# Altium PCB PCB.PcbDoc (part 2 of 3)
Units mm, origin at the board's own origin, x right, y up, seen from the top; angles counter-clockwise.
Board outline 53 x 36 mm, 2 copper layers (Top Layer, Bottom Layer); 30 components, 49 nets, 163 pads, 111 vias.
Unrouted connection lines stored in the file: 1.
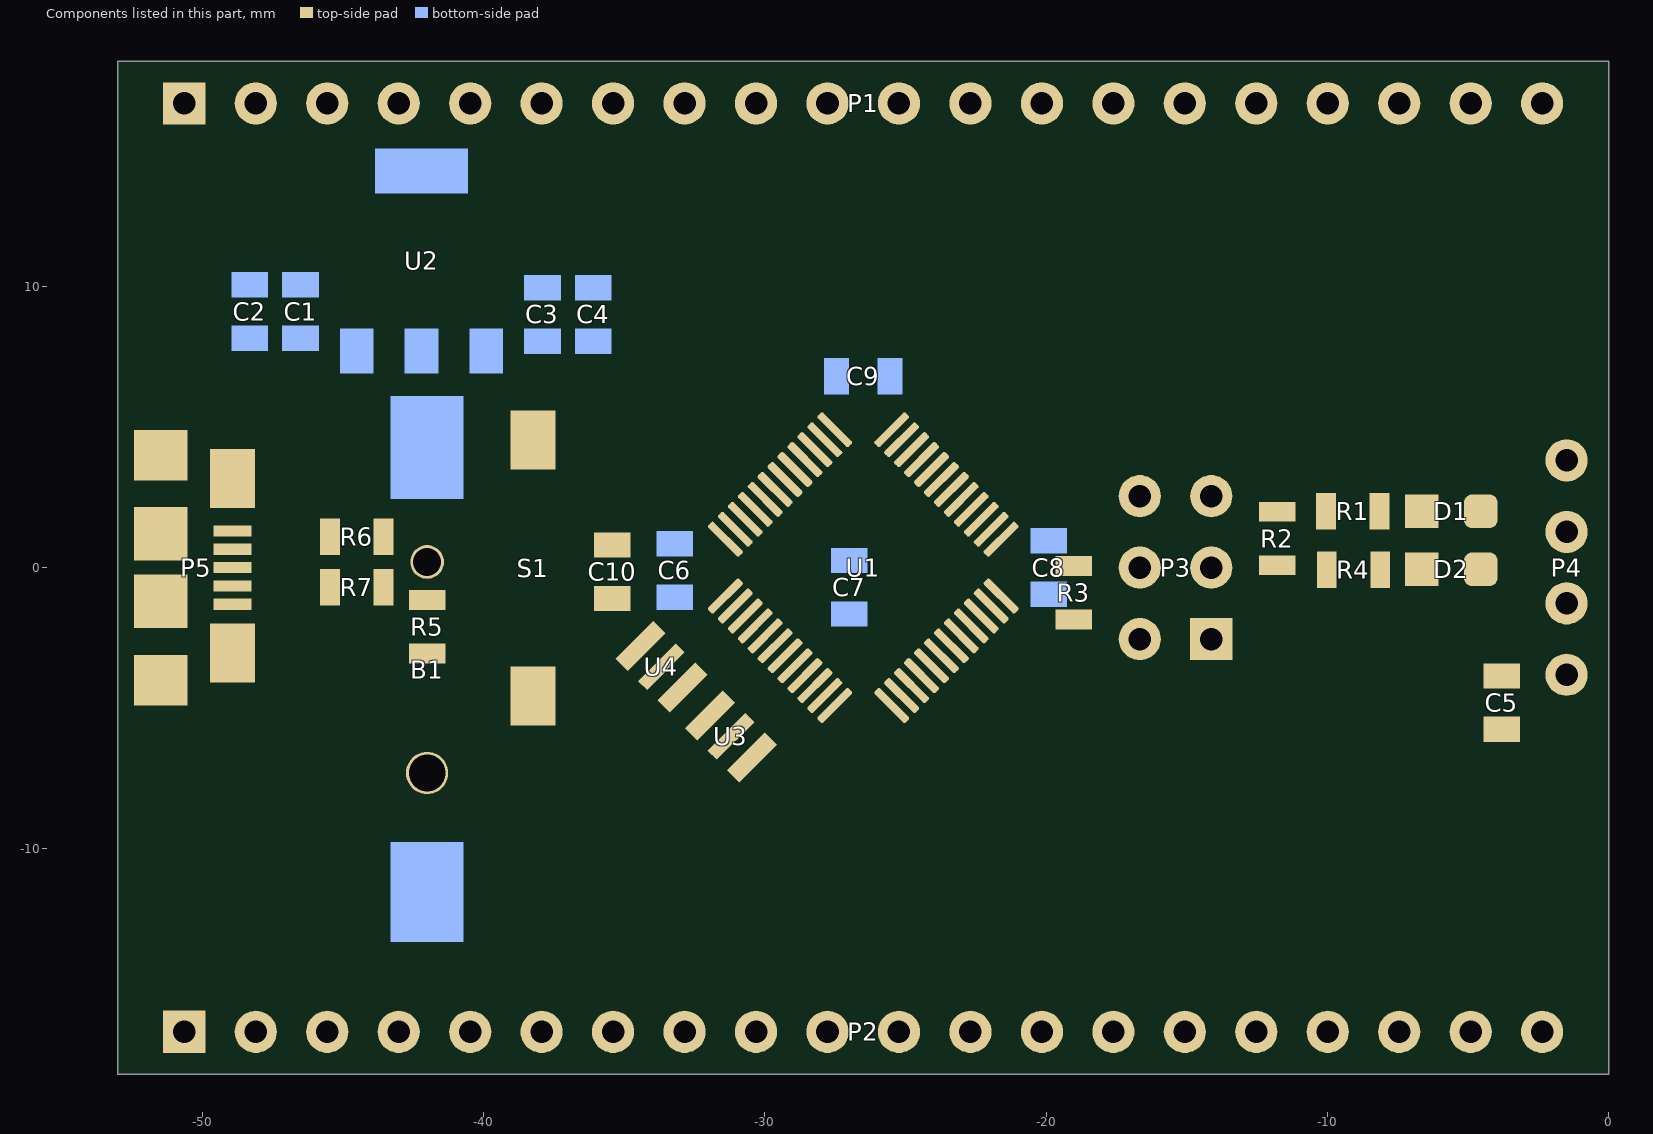
[diagram p2: the components of this part, seen from the top]

## Via types
v1: diameter 0.8, hole 0.5, Top Layer to Bottom Layer, tented both sides, 111 vias

## Nets (pads, with @x,y where several pads share a name; then routed paths per layer and width w, separated by ;. In a path a pad name is that pad's centre, name@x,y a point inside that pad or via, vN(x,y) a via of type N, cw(c..) or ccw(c..) an arc to the next point about the centre after c; other vN are vias at no path point) (continued)
copper on no net: (continued)
  Bottom Layer w0.018: -31.034,-14.158 -19.744,-14.158 ; -31.034,-14.141 -19.744,-14.141 ; -31.034,-14.123 -19.744,-14.123 ; -31.034,-14.105 -19.744,-14.105 ; -31.034,-14.087 -19.744,-14.087 ; -31.034,-14.07 -19.744,-14.07 ; -31.034,-14.052 -19.744,-14.052 ; -31.034,-14.034 -19.744,-14.034 ; -31.034,-14.016 -19.744,-14.016 ; -31.034,-13.998 -19.744,-13.998 ; -31.034,-13.981 -19.744,-13.981 ; -31.034,-13.963 -19.744,-13.963 ; -31.034,-13.945 -19.744,-13.945 ; -31.034,-13.927 -19.744,-13.927 ; -31.034,-13.91 -19.744,-13.91 ; -31.034,-13.892 -19.744,-13.892 ; -31.034,-13.874 -19.744,-13.874 ; -31.034,-13.856 -19.744,-13.856 ; -31.034,-13.838 -19.744,-13.838 ; -31.034,-13.821 -19.744,-13.821 ; -31.034,-13.803 -19.744,-13.803 ; -31.034,-13.785 -19.744,-13.785 ; -31.034,-13.767 -19.744,-13.767 ; -31.034,-13.75 -19.744,-13.75 ; -31.034,-13.732 -30.163,-13.732 ; -31.034,-13.714 -30.198,-13.714 ; -31.034,-13.696 -30.234,-13.696 ; -31.034,-13.678 -30.269,-13.678 ; -31.034,-13.661 -30.287,-13.661 ; -31.034,-13.643 -30.323,-13.643 ; -31.034,-13.625 -30.341,-13.625 ; -31.034,-13.607 -30.358,-13.607 ; -31.034,-13.589 -30.376,-13.589 ; -31.034,-13.572 -30.394,-13.572 ; -31.034,-13.554 -30.412,-13.554 ; -31.034,-13.536 -30.429,-13.536 ; -31.034,-13.518 -30.447,-13.518 ; -31.034,-13.501 -30.465,-13.501 ; -31.034,-13.483 -30.483,-13.483 ; -31.034,-13.465 -30.501,-13.465 ; -31.034,-13.447 -30.501,-13.447 ; -31.034,-13.429 -30.518,-13.429 ; -31.034,-13.412 -30.536,-13.412 ; -31.034,-13.394 -30.536,-13.394 ; -31.034,-13.376 -30.554,-13.376 ; -31.034,-13.358 -30.554,-13.358 ; -31.034,-13.341 -30.572,-13.341 ; -31.034,-13.323 -30.572,-13.323 ; -31.034,-13.305 -30.572,-13.305 ; -31.034,-13.287 -30.589,-13.287 ; -31.034,-13.269 -30.589,-13.269 ; -31.034,-13.252 -30.589,-13.252 ; -31.034,-13.234 -30.607,-13.234 ; -31.034,-13.216 -30.607,-13.216 ; -31.034,-13.198 -30.607,-13.198 ; -31.034,-13.181 -30.607,-13.181 ; -31.034,-13.163 -30.607,-13.163 ; -31.034,-13.145 -30.607,-13.145 ; -31.034,-13.127 -30.607,-13.127 ; -31.034,-13.109 -30.607,-13.109 ; -31.034,-13.092 -30.607,-13.092 ; -31.034,-13.074 -30.607,-13.074 ; -31.034,-13.056 -30.607,-13.056 ; -31.034,-13.038 -30.607,-13.038 ; -31.034,-13.021 -30.607,-13.021 ; -31.034,-13.003 -30.607,-13.003 ; -31.034,-12.985 -30.607,-12.985 ; -31.034,-12.967 -30.607,-12.967 ; -31.034,-12.949 -30.607,-12.949 ; -31.034,-12.932 -30.607,-12.932 ; -31.034,-12.914 -30.607,-12.914 ; -31.034,-12.896 -30.607,-12.896 ; -31.034,-12.878 -30.607,-12.878 ; -31.034,-12.861 -30.607,-12.861 ; -31.034,-12.843 -30.607,-12.843 ; -31.034,-12.825 -30.607,-12.825 ; -31.034,-12.807 -30.607,-12.807 ; -31.034,-12.789 -30.607,-12.789 ; -31.034,-12.772 -30.607,-12.772 ; -31.034,-12.754 -30.607,-12.754 ; -31.034,-12.736 -30.607,-12.736 ; -31.034,-12.718 -30.607,-12.718 ; -31.034,-12.7 -30.607,-12.7 ; -31.034,-12.683 -30.607,-12.683 ; -31.034,-12.665 -30.607,-12.665 ; -31.034,-12.647 -30.607,-12.647 ; -31.034,-12.629 -30.607,-12.629 ; -31.034,-12.612 -30.607,-12.612 ; -31.034,-12.594 -30.607,-12.594 ; -31.034,-12.576 -30.607,-12.576 ; -31.034,-12.558 -30.607,-12.558 ; -31.034,-12.54 -30.607,-12.54 ; -31.034,-12.523 -30.607,-12.523 ; -31.034,-12.505 -30.607,-12.505 ; -31.034,-12.487 -30.607,-12.487 ; -31.034,-12.469 -30.607,-12.469 ; -31.034,-12.452 -30.607,-12.452 ; -31.034,-12.434 -30.607,-12.434 ; -31.034,-12.416 -30.607,-12.416 ; -31.034,-12.398 -30.607,-12.398 ; -31.034,-12.38 -30.607,-12.38 ; -31.034,-12.363 -30.607,-12.363 ; -31.034,-12.345 -30.607,-12.345 ; -31.034,-12.327 -30.607,-12.327 ; -31.034,-12.309 -30.607,-12.309 ; -31.034,-12.292 -30.607,-12.292 ; -31.034,-12.274 -30.607,-12.274 ; -31.034,-12.256 -30.607,-12.256 ; -31.034,-12.238 -30.607,-12.238 ; -31.034,-12.22 -30.607,-12.22 ; -31.034,-12.203 -30.607,-12.203 ; -31.034,-12.185 -30.607,-12.185 ; -31.034,-12.167 -30.607,-12.167 ; -31.034,-12.149 -30.607,-12.149 ; -31.034,-12.132 -30.607,-12.132 ; -31.034,-12.114 -30.607,-12.114 ; -31.034,-12.096 -30.607,-12.096 ; -31.034,-12.078 -30.607,-12.078 ; -31.034,-12.06 -30.607,-12.06 ; -31.034,-12.043 -30.607,-12.043 ; -31.034,-12.025 -30.607,-12.025 ; -31.034,-12.007 -30.607,-12.007 ; -31.034,-11.989 -30.607,-11.989 ; -31.034,-11.972 -30.607,-11.972 ; -31.034,-11.954 -30.607,-11.954 ; -31.034,-11.936 -30.607,-11.936 ; -31.034,-11.918 -30.607,-11.918 ; -31.034,-11.9 -30.607,-11.9 ; -31.034,-11.883 -30.607,-11.883 ; -31.034,-11.865 -30.607,-11.865 ; -31.034,-11.847 -30.607,-11.847 ; -31.034,-11.829 -30.607,-11.829 ; -31.034,-11.811 -30.607,-11.811 ; -31.034,-11.794 -30.607,-11.794 ; -31.034,-11.776 -30.607,-11.776 ; -31.034,-11.758 -30.607,-11.758 ; -31.034,-11.74 -30.607,-11.74 ; -31.034,-11.723 -30.607,-11.723 ; -31.034,-11.705 -30.607,-11.705 ; -31.034,-11.687 -30.607,-11.687 ; -31.034,-11.669 -30.607,-11.669 ; -31.034,-11.651 -30.607,-11.651 ; -31.034,-11.634 -30.607,-11.634 ; -31.034,-11.616 -30.607,-11.616 ; -31.034,-11.598 -30.607,-11.598 ; -31.034,-11.58 -30.607,-11.58 ; -31.034,-11.563 -30.607,-11.563 ; -31.034,-11.545 -30.607,-11.545 ; -31.034,-11.527 -30.607,-11.527 ; -31.034,-11.509 -30.607,-11.509 ; -31.034,-11.491 -30.607,-11.491 ; -31.034,-11.474 -30.607,-11.474 ; -31.034,-11.456 -30.607,-11.456 ; -31.034,-11.438 -30.607,-11.438 ; -31.034,-11.42 -30.607,-11.42 ; -31.034,-11.403 -30.607,-11.403 ; -31.034,-11.385 -30.607,-11.385 ; -31.034,-11.367 -30.607,-11.367 ; -31.034,-11.349 -30.607,-11.349 ; -31.034,-11.331 -30.607,-11.331 ; -31.034,-11.314 -30.607,-11.314 ; -31.034,-11.296 -30.607,-11.296 ; -31.034,-11.278 -30.607,-11.278 ; -31.034,-11.26 -30.607,-11.26 ; -31.034,-11.243 -30.607,-11.243 ; -31.034,-11.225 -30.607,-11.225 ; -31.034,-11.207 -30.607,-11.207 ; -31.034,-11.189 -30.607,-11.189 ; -31.034,-11.171 -30.607,-11.171 ; -31.034,-11.154 -30.607,-11.154 ; -31.034,-11.136 -30.607,-11.136 ; -31.034,-11.118 -30.607,-11.118 ; -31.034,-11.1 -30.607,-11.1 ; -31.034,-11.083 -30.607,-11.083 ; -31.034,-11.065 -30.607,-11.065 ; -31.034,-11.047 -30.607,-11.047 ; -31.034,-11.029 -30.607,-11.029 ; -31.034,-11.011 -30.607,-11.011 ; -31.034,-10.994 -30.607,-10.994 ; -31.034,-10.976 -30.607,-10.976 ; -31.034,-10.958 -30.607,-10.958 ; -31.034,-10.94 -30.607,-10.94 ; -31.034,-10.922 -30.607,-10.922 ; -31.034,-10.905 -30.607,-10.905 ; -31.034,-10.887 -30.607,-10.887 ; -31.034,-10.869 -30.607,-10.869 ; -31.034,-10.851 -30.607,-10.851 ; -31.034,-10.834 -30.607,-10.834 ; -31.034,-10.816 -30.607,-10.816 ; -31.034,-10.798 -30.607,-10.798 ; -31.034,-10.78 -30.607,-10.78 ; -31.034,-10.762 -30.607,-10.762 ; -31.034,-10.745 -30.607,-10.745 ; -31.034,-10.727 -30.607,-10.727 ; -31.034,-10.709 -30.607,-10.709 ; -31.034,-10.691 -30.607,-10.691 ; -31.034,-10.674 -30.607,-10.674 ; -31.034,-10.656 -30.607,-10.656 ; -31.034,-10.638 -30.607,-10.638 ; -31.034,-10.62 -30.607,-10.62 ; -31.034,-10.602 -30.607,-10.602 ; -31.034,-10.585 -30.607,-10.585 ; -31.034,-10.567 -30.607,-10.567 ; -31.034,-10.549 -30.607,-10.549 ; -31.034,-10.531 -30.607,-10.531 ; -31.034,-10.514 -30.607,-10.514 ; -31.034,-10.496 -30.607,-10.496 ; -31.034,-10.478 -30.607,-10.478 ; -31.034,-10.46 -30.607,-10.46 ; -31.034,-10.442 -30.607,-10.442 ; -31.034,-10.425 -30.607,-10.425 ; -31.034,-10.407 -30.607,-10.407 ; -31.034,-10.389 -30.607,-10.389 ; -31.034,-10.371 -30.607,-10.371 ; -31.034,-10.354 -30.607,-10.354 ; -31.034,-10.336 -30.607,-10.336 ; -31.034,-10.318 -30.607,-10.318 ; -31.034,-10.3 -30.607,-10.3 ; -31.034,-10.282 -30.607,-10.282 ; -31.034,-10.265 -30.607,-10.265 ; -31.034,-10.247 -30.607,-10.247 ; -31.034,-10.229 -30.607,-10.229 ; -31.034,-10.211 -30.607,-10.211 ; -31.034,-10.194 -30.607,-10.194 ; -31.034,-10.176 -30.607,-10.176 ; -31.034,-10.158 -30.607,-10.158 ; -31.034,-10.14 -30.607,-10.14 ; -31.034,-10.122 -30.607,-10.122 ; -31.034,-10.105 -30.607,-10.105 ; -31.034,-10.087 -30.607,-10.087 ; -31.034,-10.069 -30.607,-10.069 ; -31.034,-10.051 -30.607,-10.051 ; -31.034,-10.033 -30.607,-10.033 ; -31.034,-10.016 -30.607,-10.016 ; -31.034,-9.998 -30.607,-9.998 ; -31.034,-9.98 -30.607,-9.98 ; -31.034,-9.962 -30.607,-9.962 ; -31.034,-9.945 -30.607,-9.945 ; -31.034,-9.927 -30.607,-9.927 ; -31.034,-9.909 -30.607,-9.909 ; -31.034,-9.891 -30.607,-9.891 ; -31.034,-9.873 -30.607,-9.873 ; -31.034,-9.856 -30.607,-9.856 ; -31.034,-9.838 -30.607,-9.838 ; -31.034,-9.82 -30.607,-9.82 ; -31.034,-9.802 -30.607,-9.802 ; -31.034,-9.785 -30.607,-9.785 ; -31.034,-9.767 -30.607,-9.767 ; -31.034,-9.749 -30.607,-9.749 ; -31.034,-9.731 -30.607,-9.731 ; -31.034,-9.713 -30.607,-9.713 ; -31.034,-9.696 -30.607,-9.696 ; -31.034,-9.678 -30.607,-9.678 ; -31.034,-9.66 -30.607,-9.66 ; -31.034,-9.642 -30.607,-9.642 ; -31.034,-9.625 -30.607,-9.625 ; -31.034,-9.607 -30.607,-9.607 ; -31.034,-9.589 -30.607,-9.589 ; -31.034,-9.571 -30.607,-9.571 ; -31.034,-9.553 -30.607,-9.553 ; -31.034,-9.536 -30.607,-9.536 ; -31.034,-9.518 -30.607,-9.518 ; -31.034,-9.5 -30.607,-9.5 ; -31.034,-9.482 -30.607,-9.482 ; -31.034,-9.465 -30.607,-9.465 ; -31.034,-9.447 -30.607,-9.447 ; -31.034,-9.429 -30.607,-9.429 ; -31.034,-9.411 -30.607,-9.411 ; -31.034,-9.393 -30.607,-9.393 ; -31.034,-9.376 -30.607,-9.376 ; -31.034,-9.358 -30.607,-9.358 ; -31.034,-9.34 -30.607,-9.34 ; -31.034,-9.322 -30.607,-9.322 ; -31.034,-9.305 -30.607,-9.305 ; -31.034,-9.287 -30.607,-9.287 ; -31.034,-9.269 -19.744,-9.269 ; -31.034,-9.251 -19.744,-9.251 ; -31.034,-9.233 -19.744,-9.233 ; -31.034,-9.216 -19.744,-9.216 ; -31.034,-9.198 -19.744,-9.198 ; -31.034,-9.18 -19.744,-9.18 ; -31.034,-9.162 -19.744,-9.162 ; -31.034,-9.144 -19.744,-9.144 ; -31.034,-9.127 -19.744,-9.127 ; -31.034,-9.109 -19.744,-9.109 ; -31.034,-9.091 -19.744,-9.091 ; -31.034,-9.073 -19.744,-9.073 ; -31.034,-9.056 -19.744,-9.056 ; -31.034,-9.038 -19.744,-9.038 ; -31.034,-9.02 -19.744,-9.02 ; -31.034,-9.002 -19.744,-9.002 ; -31.034,-8.984 -19.744,-8.984 ; -31.034,-8.967 -19.744,-8.967 ; -31.034,-8.949 -19.744,-8.949 ; -31.034,-8.931 -19.744,-8.931 ; -31.034,-8.913 -19.744,-8.913 ; -31.034,-8.896 -19.744,-8.896 ; -31.034,-8.878 -19.744,-8.878 ; -31.034,-8.86 -19.744,-8.86 ; -29.878,-12.629 -29.861,-12.629 ; -29.878,-12.612 -29.861,-12.612 ; -29.878,-12.594 -29.861,-12.594 ; -29.878,-12.576 -29.861,-12.576 ; -29.878,-12.558 -29.861,-12.558 ; -29.878,-12.54 -29.825,-12.54 ; -29.878,-12.523 -29.825,-12.523 ; -29.878,-12.505 -29.843,-12.505 ; -29.878,-12.078 -29.861,-12.078 ; -29.878,-12.06 -29.861,-12.06 ; -29.878,-12.043 -29.861,-12.043 ; -29.878,-12.025 -29.861,-12.025 ; -29.878,-12.007 -29.861,-12.007 ; -29.878,-11.989 -29.861,-11.989 ; -29.878,-11.972 -29.825,-11.972 ; -29.878,-11.954 -29.825,-11.954 ; -29.878,-11.936 -29.843,-11.936 ; -29.843,-12.576 -29.807,-12.576 ; -29.843,-12.558 -29.807,-12.558 ; -29.843,-12.007 -29.807,-12.007 ; -29.843,-11.989 -29.825,-11.989 ; -29.825,-12.612 -29.772,-12.612 ; -29.825,-12.594 -29.754,-12.594 ; -29.825,-12.06 -29.772,-12.06 ; -29.825,-12.043 -29.772,-12.043 ; -29.825,-12.025 -29.807,-12.025 ; -29.807,-12.629 -29.772,-12.629 ; -29.807,-12.078 -29.772,-12.078 ; -29.789,-12.576 -29.754,-12.576 ; -29.789,-12.025 -29.754,-12.025 ; -29.772,-12.558 -29.7,-12.558 ; -29.772,-12.54 -29.7,-12.54 ; -29.772,-12.007 -29.754,-12.007 ; -29.772,-11.989 -29.7,-11.989 ; -29.772,-11.972 -29.7,-11.972 ; -29.754,-12.523 -29.7,-12.523 ; -29.754,-12.505 -29.7,-12.505 ; -29.754,-11.954 -29.7,-11.954 ; -29.754,-11.936 -29.7,-11.936 ; -29.736,-12.629 -29.7,-12.629 ; -29.736,-12.612 -29.7,-12.612 ; -29.736,-12.594 -29.7,-12.594 ; -29.736,-12.576 -29.7,-12.576 ; -29.736,-12.078 -29.7,-12.078 ; -29.736,-12.06 -29.7,-12.06 ; -29.736,-12.043 -29.7,-12.043 ; -29.736,-12.025 -29.7,-12.025 ; -29.736,-12.007 -29.7,-12.007 ; -29.683,-12.505 -29.558,-12.505 ; -29.683,-11.936 -29.558,-11.936 ; -29.683,-10.887 -27.425,-10.887 ; -29.683,-10.869 -27.425,-10.869 ; -29.683,-10.851 -27.425,-10.851 ; -29.683,-10.834 -27.425,-10.834 ; -29.683,-10.816 -27.442,-10.816 ; -29.683,-10.798 -27.442,-10.798 ; -29.665,-10.976 -29.06,-10.976 ; -29.665,-10.958 -29.043,-10.958 ; -29.665,-10.94 -27.407,-10.94 ; -29.665,-10.922 -27.407,-10.922 ; -29.665,-10.905 -27.407,-10.905 ; -29.665,-10.78 -28.847,-10.78 ; -29.665,-10.762 -28.865,-10.762 ; -29.665,-10.745 -28.883,-10.745 ; -29.665,-10.727 -28.9,-10.727 ; -29.647,-11.047 -29.096,-11.047 ; -29.647,-11.029 -29.078,-11.029 ; -29.647,-11.011 -29.078,-11.011 ; -29.647,-10.994 -29.078,-10.994 ; -29.647,-10.709 -28.918,-10.709 ; -29.647,-10.691 -28.936,-10.691 ; -29.629,-12.629 -29.612,-12.629 ; -29.629,-12.612 -29.612,-12.612 ; -29.629,-12.594 -29.612,-12.594 ; -29.629,-12.576 -29.612,-12.576 ; -29.629,-12.558 -29.612,-12.558 ; -29.629,-12.54 -29.612,-12.54 ; -29.629,-12.523 -29.612,-12.523 ; -29.629,-12.078 -29.594,-12.078 ; -29.629,-12.06 -29.594,-12.06 ; -29.629,-12.043 -29.594,-12.043 ; -29.629,-12.025 -29.594,-12.025 ; -29.629,-12.007 -29.594,-12.007 ; -29.629,-11.989 -29.594,-11.989 ; -29.629,-11.972 -29.594,-11.972 ; -29.629,-11.954 -29.594,-11.954 ; -29.629,-11.118 -29.078,-11.118 ; -29.629,-11.1 -29.078,-11.1 ; -29.629,-11.083 -29.078,-11.083 ; -29.629,-11.065 -29.078,-11.065 ; -29.629,-10.674 -28.972,-10.674 ; -29.612,-11.189 -29.06,-11.189 ; -29.612,-11.171 -29.06,-11.171 ; -29.612,-11.154 -29.06,-11.154 ; -29.612,-11.136 -29.078,-11.136 ; -29.612,-10.656 -29.007,-10.656 ; -29.594,-11.26 -29.043,-11.26 ; -29.594,-11.243 -29.043,-11.243 ; -29.594,-11.225 -29.043,-11.225 ; -29.594,-11.207 -29.06,-11.207 ; -29.576,-11.331 -29.025,-11.331 ; -29.576,-11.314 -29.025,-11.314 ; -29.576,-11.296 -29.025,-11.296 ; -29.576,-11.278 -29.043,-11.278 ; -29.576,-10.638 -29.043,-10.638 ; -29.558,-11.403 -29.007,-11.403 ; -29.558,-11.385 -29.007,-11.385 ; -29.558,-11.367 -29.007,-11.367 ; -29.558,-11.349 -29.025,-11.349 ; -29.54,-11.474 -28.989,-11.474 ; -29.54,-11.456 -28.989,-11.456 ; -29.54,-11.438 -28.989,-11.438 ; -29.54,-11.42 -29.007,-11.42 ; -29.54,-10.62 -29.078,-10.62 ; -29.523,-11.545 -28.972,-11.545 ; -29.523,-11.527 -28.972,-11.527 ; -29.523,-11.509 -28.972,-11.509 ; -29.523,-11.491 -28.989,-11.491 ; -29.505,-11.616 -28.954,-11.616 ; -29.505,-11.598 -28.954,-11.598 ; -29.505,-11.58 -28.954,-11.58 ; -29.505,-11.563 -28.972,-11.563 ; -29.505,-10.602 -29.132,-10.602 ; -29.487,-11.687 -28.936,-11.687 ; -29.487,-11.669 -28.936,-11.669 ; -29.487,-11.651 -28.936,-11.651 ; -29.487,-11.634 -28.954,-11.634 ; -29.469,-11.758 -28.918,-11.758 ; -29.469,-11.74 -28.918,-11.74 ; -29.469,-11.723 -28.918,-11.723 ; -29.469,-11.705 -28.936,-11.705 ; -29.452,-11.829 -28.9,-11.829 ; -29.452,-11.811 -28.9,-11.811 ; -29.452,-11.794 -28.9,-11.794 ; -29.452,-11.776 -28.918,-11.776 ; -29.434,-12.683 -29.292,-12.683 ; -29.434,-12.665 -29.292,-12.665 ; -29.434,-12.647 -29.363,-12.647 ; -29.434,-12.629 -29.38,-12.629 ; -29.434,-11.865 -28.883,-11.865 ; -29.434,-11.847 -28.9,-11.847 ; -29.416,-11.9 -28.883,-11.9 ; -29.416,-11.883 -28.883,-11.883 ; -29.416,-10.585 -29.238,-10.585 ; -29.398,-11.918 -28.883,-11.918 ; -29.38,-12.7 -29.292,-12.7 ; -29.38,-11.954 -28.865,-11.954 ; -29.38,-11.936 -28.865,-11.936 ; -29.363,-12.878 -29.292,-12.878 ; -29.363,-12.861 -29.292,-12.861 ; -29.363,-12.843 -29.292,-12.843 ; -29.363,-12.825 -29.292,-12.825 ; -29.363,-12.807 -29.292,-12.807 ; -29.363,-12.789 -29.292,-12.789 ; -29.363,-12.772 -29.292,-12.772 ; -29.363,-12.754 -29.292,-12.754 ; -29.363,-12.736 -29.292,-12.736 ; -29.363,-12.718 -29.292,-12.718 ; -29.363,-11.972 -28.865,-11.972 ; -29.345,-12.647 -29.292,-12.647 ; -29.345,-12.629 -29.292,-12.629 ; -29.345,-11.989 -28.865,-11.989 ; -29.309,-12.007 -28.847,-12.007 ; -29.292,-12.025 -28.847,-12.025 ; -29.256,-12.043 -28.847,-12.043 ; -29.22,-12.06 -28.847,-12.06 ; -29.203,-12.772 -28.954,-12.772 ; -29.203,-12.754 -28.954,-12.754 ; -29.203,-12.736 -28.954,-12.736 ; -29.203,-12.718 -29.132,-12.718 ; -29.203,-12.7 -29.132,-12.7 ; -29.185,-12.861 -29.007,-12.861 ; -29.185,-12.843 -28.989,-12.843 ; -29.185,-12.825 -29.167,-12.825 ; -29.185,-12.683 -29.132,-12.683 ; -29.185,-12.665 -28.989,-12.665 ; -29.167,-12.878 -29.025,-12.878 ; -29.167,-12.647 -29.007,-12.647 ; -29.149,-12.629 -29.025,-12.629 ; -29.149,-12.078 -28.829,-12.078 ; -29.06,-12.825 -28.972,-12.825 ; -29.043,-12.807 -28.972,-12.807 ; -29.043,-12.683 -28.972,-12.683 ; -29.025,-12.789 -28.954,-12.789 ; -29.025,-12.718 -28.954,-12.718 ; -29.025,-12.7 -28.972,-12.7 ; -28.883,-12.878 -28.811,-12.878 ; -28.883,-12.861 -28.811,-12.861 ; -28.883,-12.843 -28.811,-12.843 ; -28.883,-12.825 -28.811,-12.825 ; -28.883,-12.807 -28.811,-12.807 ; -28.883,-12.789 -28.811,-12.789 ; -28.883,-12.772 -28.811,-12.772 ; -28.883,-12.754 -28.811,-12.754 ; -28.883,-12.736 -28.811,-12.736 ; -28.883,-12.718 -28.811,-12.718 ; -28.883,-12.7 -28.811,-12.7 ; -28.883,-12.683 -28.811,-12.683 ; -28.883,-12.665 -28.811,-12.665 ; -28.883,-12.647 -28.811,-12.647 ; -28.883,-12.629 -28.811,-12.629 ; -28.883,-12.558 -28.811,-12.558 ; -28.883,-12.54 -28.811,-12.54 ; -28.883,-12.523 -28.811,-12.523 ; -28.883,-10.958 -28.189,-10.958 ; -28.847,-10.976 -28.207,-10.976 ; -28.829,-10.994 -28.225,-10.994 ; -28.829,-10.78 -28.011,-10.78 ; -28.811,-11.011 -28.225,-11.011 ; -28.811,-10.762 -28.029,-10.762 ; -28.811,-10.745 -28.047,-10.745 ; -28.811,-10.727 -28.065,-10.727 ; -28.794,-11.047 -28.225,-11.047 ; -28.794,-11.029 -28.225,-11.029 ; -28.794,-10.709 -28.083,-10.709 ; -28.776,-11.1 -28.225,-11.1 ; -28.776,-11.083 -28.225,-11.083 ; -28.776,-11.065 -28.225,-11.065 ; -28.776,-10.691 -28.1,-10.691 ; -28.776,-10.674 -28.136,-10.674 ; -28.758,-11.154 -28.207,-11.154 ; -28.758,-11.136 -28.207,-11.136 ; -28.758,-11.118 -28.225,-11.118 ; -28.758,-10.656 -28.154,-10.656 ; -28.74,-12.807 -28.651,-12.807 ; -28.74,-11.225 -28.189,-11.225 ; -28.74,-11.207 -28.189,-11.207 ; -28.74,-11.189 -28.207,-11.189 ; -28.74,-11.171 -28.207,-11.171 ; -28.723,-12.843 -28.545,-12.843 ; -28.723,-12.825 -28.651,-12.825 ; -28.723,-12.789 -28.651,-12.789 ; -28.723,-12.772 -28.616,-12.772 ; -28.723,-12.754 -28.563,-12.754 ; -28.723,-12.665 -28.545,-12.665 ; -28.723,-12.647 -28.563,-12.647 ; -28.723,-12.629 -28.58,-12.629 ; -28.723,-11.296 -28.171,-11.296 ; -28.723,-11.278 -28.171,-11.278 ; -28.723,-11.26 -28.189,-11.26 ; -28.723,-11.243 -28.189,-11.243 ; -28.723,-10.638 -28.189,-10.638 ; -28.705,-12.861 -28.545,-12.861 ; -28.705,-11.367 -28.154,-11.367 ; -28.705,-11.349 -28.154,-11.349 ; -28.705,-11.331 -28.171,-11.331 ; -28.705,-11.314 -28.171,-11.314 ; -28.705,-10.62 -28.225,-10.62 ; -28.687,-12.878 -28.545,-12.878 ; -28.687,-12.736 -28.545,-12.736 ; -28.687,-11.438 -28.136,-11.438 ; -28.687,-11.42 -28.136,-11.42 ; -28.687,-11.403 -28.154,-11.403 ; -28.687,-11.385 -28.154,-11.385 ; -28.669,-11.509 -28.118,-11.509 ; -28.669,-11.491 -28.118,-11.491 ; -28.669,-11.474 -28.136,-11.474 ; -28.669,-11.456 -28.136,-11.456 ; -28.651,-11.58 -28.1,-11.58 ; -28.651,-11.563 -28.1,-11.563 ; -28.651,-11.545 -28.118,-11.545 ; -28.651,-11.527 -28.118,-11.527 ; -28.651,-10.602 -28.278,-10.602 ; -28.634,-12.718 -28.545,-12.718 ; -28.634,-11.651 -28.083,-11.651 ; -28.634,-11.634 -28.083,-11.634 ; -28.634,-11.616 -28.1,-11.616 ; -28.634,-11.598 -28.1,-11.598 ; -28.616,-12.7 -28.545,-12.7 ; -28.616,-12.683 -28.545,-12.683 ; -28.616,-11.723 -28.065,-11.723 ; -28.616,-11.705 -28.065,-11.705 ; -28.616,-11.687 -28.083,-11.687 ; -28.616,-11.669 -28.083,-11.669 ; -28.598,-11.794 -28.047,-11.794 ; -28.598,-11.776 -28.047,-11.776 ; -28.598,-11.758 -28.065,-11.758 ; -28.598,-11.74 -28.065,-11.74 ; -28.58,-11.865 -28.029,-11.865 ; -28.58,-11.847 -28.029,-11.847 ; -28.58,-11.829 -28.047,-11.829 ; -28.58,-11.811 -28.047,-11.811 ; -28.58,-10.585 -28.385,-10.585 ; -28.563,-11.936 -28.011,-11.936 ; -28.563,-11.918 -28.011,-11.918 ; -28.563,-11.9 -28.029,-11.9 ; -28.563,-11.883 -28.029,-11.883 ; -28.545,-12.007 -27.994,-12.007 ; -28.545,-11.989 -27.994,-11.989 ; -28.545,-11.972 -28.011,-11.972 ; -28.545,-11.954 -28.011,-11.954 ; -28.527,-12.078 -27.976,-12.078 ; -28.527,-12.06 -27.976,-12.06 ; -28.527,-12.043 -27.994,-12.043 ; -28.527,-12.025 -27.994,-12.025 ; -28.474,-12.878 -28.403,-12.878 ; -28.474,-12.861 -28.243,-12.861 ; -28.474,-12.843 -28.243,-12.843 ; -28.474,-12.825 -28.385,-12.825 ; -28.474,-12.807 -28.403,-12.807 ; -28.474,-12.789 -28.403,-12.789 ; -28.474,-12.772 -28.403,-12.772 ; -28.474,-12.754 -28.26,-12.754 ; -28.474,-12.736 -28.278,-12.736 ; -28.474,-12.718 -28.403,-12.718 ; -28.474,-12.7 -28.403,-12.7 ; -28.456,-12.683 -28.385,-12.683 ; -28.456,-12.665 -28.26,-12.665 ; -28.438,-12.647 -28.26,-12.647 ; -28.42,-12.629 -28.278,-12.629 ; -28.385,-12.878 -28.278,-12.878 ; -28.331,-12.772 -28.243,-12.772 ; -28.314,-12.825 -28.243,-12.825 ; -28.314,-12.789 -28.243,-12.789 ; -28.296,-12.807 -28.243,-12.807 ; -28.296,-12.683 -28.26,-12.683 ; -28.154,-12.878 -27.94,-12.878 ; -28.154,-12.861 -27.94,-12.861 ; -28.154,-12.843 -27.94,-12.843 ; -28.154,-12.718 -27.94,-12.718 ; -28.154,-12.7 -27.94,-12.7 ; -28.154,-12.683 -27.94,-12.683 ; -28.154,-12.576 -27.94,-12.576 ; -28.154,-12.558 -27.94,-12.558 ; -28.154,-12.54 -27.94,-12.54 ; -28.029,-12.825 -27.94,-12.825 ; -28.029,-12.807 -27.94,-12.807 ; -28.029,-12.789 -27.94,-12.789 ; -28.029,-12.772 -27.94,-12.772 ; -28.029,-12.754 -27.94,-12.754 ; -28.029,-12.736 -27.94,-12.736 ; -28.029,-12.665 -27.94,-12.665 ; -28.029,-12.647 -27.94,-12.647 ; -28.029,-12.629 -27.94,-12.629 ; -28.029,-12.612 -27.94,-12.612 ; -28.029,-12.594 -27.94,-12.594 ; -28.029,-10.958 -27.407,-10.958 ; -28.029,-10.674 -27.478,-10.674 ; -28.029,-10.656 -27.478,-10.656 ; -28.029,-10.638 -27.478,-10.638 ; -28.011,-10.745 -27.46,-10.745 ; -28.011,-10.727 -27.46,-10.727 ; -28.011,-10.709 -27.46,-10.709 ; -28.011,-10.691 -27.46,-10.691 ; -27.994,-10.976 -27.389,-10.976 ; -27.994,-10.78 -27.442,-10.78 ; -27.994,-10.762 -27.442,-10.762 ; -27.976,-10.994 -27.389,-10.994 ; -27.958,-11.011 -27.389,-11.011 ; -27.94,-11.047 -27.371,-11.047 ; -27.94,-11.029 -27.389,-11.029 ; -27.922,-11.083 -27.371,-11.083 ; -27.922,-11.065 -27.371,-11.065 ; -27.905,-11.154 -27.354,-11.154 ; -27.905,-11.136 -27.354,-11.136 ; -27.905,-11.118 -27.354,-11.118 ; -27.905,-11.1 -27.371,-11.1 ; -27.887,-11.225 -27.336,-11.225 ; -27.887,-11.207 -27.336,-11.207 ; -27.887,-11.189 -27.336,-11.189 ; -27.887,-11.171 -27.354,-11.171 ; -27.869,-11.296 -27.318,-11.296 ; -27.869,-11.278 -27.318,-11.278 ; -27.869,-11.26 -27.318,-11.26 ; -27.869,-11.243 -27.336,-11.243 ; -27.851,-11.367 -27.3,-11.367 ; -27.851,-11.349 -27.3,-11.349 ; -27.851,-11.331 -27.3,-11.331 ; -27.851,-11.314 -27.318,-11.314 ; -27.834,-11.438 -27.282,-11.438 ; -27.834,-11.42 -27.282,-11.42 ; -27.834,-11.403 -27.282,-11.403 ; -27.834,-11.385 -27.3,-11.385 ; -27.816,-11.509 -27.265,-11.509 ; -27.816,-11.491 -27.265,-11.491 ; -27.816,-11.474 -27.265,-11.474 ; -27.816,-11.456 -27.282,-11.456 ; -27.798,-11.58 -27.247,-11.58 ; -27.798,-11.563 -27.247,-11.563 ; -27.798,-11.545 -27.247,-11.545 ; -27.798,-11.527 -27.265,-11.527 ; -27.78,-11.651 -27.229,-11.651 ; -27.78,-11.634 -27.229,-11.634 ; -27.78,-11.616 -27.229,-11.616 ; -27.78,-11.598 -27.247,-11.598 ; -27.762,-11.723 -27.211,-11.723 ; -27.762,-11.705 -27.211,-11.705 ; -27.762,-11.687 -27.211,-11.687 ; -27.762,-11.669 -27.229,-11.669 ; -27.745,-11.794 -27.194,-11.794 ; -27.745,-11.776 -27.194,-11.776 ; -27.745,-11.758 -27.194,-11.758 ; -27.745,-11.74 -27.211,-11.74 ; -27.727,-11.865 -27.176,-11.865 ; -27.727,-11.847 -27.176,-11.847 ; -27.727,-11.829 -27.176,-11.829 ; -27.727,-11.811 -27.194,-11.811 ; -27.709,-11.936 -27.158,-11.936 ; -27.709,-11.918 -27.158,-11.918 ; -27.709,-11.9 -27.158,-11.9 ; -27.709,-11.883 -27.176,-11.883 ; -27.691,-12.007 -27.14,-12.007 ; -27.691,-11.989 -27.14,-11.989 ; -27.691,-11.972 -27.14,-11.972 ; -27.691,-11.954 -27.158,-11.954 ; -27.674,-12.878 -27.62,-12.878 ; -27.674,-12.861 -27.62,-12.861 ; -27.674,-12.843 -27.62,-12.843 ; -27.674,-12.825 -27.62,-12.825 ; -27.674,-12.807 -27.62,-12.807 ; -27.674,-12.789 -27.62,-12.789 ; -27.674,-12.772 -27.62,-12.772 ; -27.674,-12.754 -27.62,-12.754 ; -27.674,-12.736 -27.62,-12.736 ; -27.674,-12.718 -27.602,-12.718 ; -27.674,-12.7 -27.602,-12.7 ; -27.674,-12.683 -27.602,-12.683 ; -27.674,-12.665 -27.442,-12.665 ; -27.674,-12.078 -27.122,-12.078 ; -27.674,-12.06 -27.122,-12.06 ; -27.674,-12.043 -27.122,-12.043 ; -27.674,-12.025 -27.14,-12.025 ; -27.656,-12.647 -27.442,-12.647 ; -27.638,-12.629 -27.531,-12.629 ; -27.531,-12.7 -27.442,-12.7 ; -27.531,-12.683 -27.442,-12.683 ; -27.514,-12.878 -27.442,-12.878 ; -27.514,-12.861 -27.442,-12.861 ; -27.514,-12.843 -27.442,-12.843 ; -27.514,-12.825 -27.442,-12.825 ; -27.514,-12.807 -27.442,-12.807 ; -27.514,-12.789 -27.442,-12.789 ; -27.514,-12.772 -27.442,-12.772 ; -27.514,-12.754 -27.442,-12.754 ; -27.514,-12.736 -27.442,-12.736 ; -27.514,-12.718 -27.442,-12.718 ; -27.514,-12.629 -27.442,-12.629 ; -27.354,-12.878 -27.282,-12.878 ; -27.354,-12.861 -27.282,-12.861 ; -27.354,-12.843 -27.105,-12.843 ; -27.354,-12.825 -27.247,-12.825 ; -27.354,-12.807 -27.265,-12.807 ; -27.354,-12.789 -27.265,-12.789 ; -27.354,-12.772 -27.282,-12.772 ; -27.354,-12.754 -27.282,-12.754 ; -27.354,-12.736 -27.282,-12.736 ; -27.354,-12.718 -27.265,-12.718 ; -27.354,-12.7 -27.265,-12.7 ; -27.354,-12.683 -27.247,-12.683 ; -27.354,-12.665 -27.105,-12.665 ; -27.354,-12.647 -27.122,-12.647 ; -27.354,-12.629 -27.282,-12.629 ; -27.336,-12.932 -27.247,-12.932 ; -27.336,-12.914 -27.265,-12.914 ; -27.336,-12.896 -27.265,-12.896 ; -27.318,-12.949 -27.122,-12.949 ; -27.3,-12.967 -27.122,-12.967 ; -27.282,-12.985 -27.14,-12.985 ; -27.265,-12.861 -27.122,-12.861 ; -27.247,-12.629 -27.14,-12.629 ; -27.229,-12.878 -27.158,-12.878 ; -27.211,-10.674 -26.66,-10.674 ; -27.211,-10.656 -26.66,-10.656 ; -27.211,-10.638 -26.66,-10.638 ; -27.194,-12.825 -27.105,-12.825 ; -27.194,-12.683 -27.105,-12.683 ; -27.194,-10.745 -26.642,-10.745 ; -27.194,-10.727 -26.642,-10.727 ; -27.194,-10.709 -26.642,-10.709 ; -27.194,-10.691 -26.66,-10.691 ; -27.176,-12.807 -27.087,-12.807 ; -27.176,-12.789 -27.087,-12.789 ; -27.176,-12.7 -27.087,-12.7 ; -27.176,-10.816 -26.625,-10.816 ; -27.176,-10.798 -26.625,-10.798 ; -27.176,-10.78 -26.625,-10.78 ; -27.176,-10.762 -26.642,-10.762 ; -27.158,-12.932 -27.122,-12.932 ; -27.158,-12.772 -27.087,-12.772 ; -27.158,-12.754 -27.087,-12.754 ; -27.158,-12.736 -27.087,-12.736 ; -27.158,-12.718 -27.087,-12.718 ; -27.158,-10.887 -26.607,-10.887 ; -27.158,-10.869 -26.607,-10.869 ; -27.158,-10.851 -26.607,-10.851 ; -27.158,-10.834 -26.625,-10.834 ; -27.14,-10.958 -26.589,-10.958 ; -27.14,-10.94 -26.589,-10.94 ; -27.14,-10.922 -26.589,-10.922 ; -27.14,-10.905 -26.607,-10.905 ; -27.122,-13.643 -27.051,-13.643 ; -27.122,-11.029 -26.571,-11.029 ; -27.122,-11.011 -26.571,-11.011 ; -27.122,-10.994 -26.571,-10.994 ; -27.122,-10.976 -26.589,-10.976 ; -27.105,-13.625 -27.051,-13.625 ; -27.105,-13.607 -27.033,-13.607 ; -27.105,-13.465 -27.033,-13.465 ; -27.105,-13.447 -27.051,-13.447 ; -27.105,-13.429 -27.051,-13.429 ; -27.105,-13.412 -27.033,-13.412 ; -27.105,-13.394 -26.873,-13.394 ; -27.105,-11.1 -26.553,-11.1 ; -27.105,-11.083 -26.553,-11.083 ; -27.105,-11.065 -26.553,-11.065 ; -27.105,-11.047 -26.571,-11.047 ; -27.087,-13.589 -27.033,-13.589 ; -27.087,-13.483 -26.873,-13.483 ; -27.087,-13.376 -26.873,-13.376 ; -27.087,-11.171 -26.536,-11.171 ; -27.087,-11.154 -26.536,-11.154 ; -27.087,-11.136 -26.536,-11.136 ; -27.087,-11.118 -26.553,-11.118 ; -27.069,-13.572 -27.016,-13.572 ; -27.069,-13.554 -26.998,-13.554 ; -27.069,-13.501 -26.873,-13.501 ; -27.069,-13.358 -26.873,-13.358 ; -27.069,-11.243 -26.518,-11.243 ; -27.069,-11.225 -26.518,-11.225 ; -27.069,-11.207 -26.518,-11.207 ; -27.069,-11.189 -26.536,-11.189 ; -27.051,-13.536 -26.98,-13.536 ; -27.051,-11.314 -26.5,-11.314 ; -27.051,-11.296 -26.5,-11.296 ; -27.051,-11.278 -26.5,-11.278 ; -27.051,-11.26 -26.518,-11.26 ; -27.033,-13.518 -26.873,-13.518 ; -27.033,-11.385 -26.482,-11.385 ; -27.033,-11.367 -26.482,-11.367 ; -27.033,-11.349 -26.482,-11.349 ; -27.033,-11.331 -26.5,-11.331 ; -27.016,-12.878 -26.945,-12.878 ; -27.016,-12.861 -26.945,-12.861 ; -27.016,-12.843 -26.945,-12.843 ; -27.016,-12.825 -26.945,-12.825 ; -27.016,-12.807 -26.945,-12.807 ; -27.016,-12.789 -26.945,-12.789 ; -27.016,-12.772 -26.945,-12.772 ; -27.016,-12.754 -26.945,-12.754 ; -27.016,-12.736 -26.945,-12.736 ; -27.016,-12.718 -26.945,-12.718 ; -27.016,-12.7 -26.945,-12.7 ; -27.016,-12.683 -26.945,-12.683 ; -27.016,-12.665 -26.945,-12.665 ; -27.016,-12.647 -26.945,-12.647 ; -27.016,-12.629 -26.945,-12.629 ; -27.016,-12.558 -26.945,-12.558 ; -27.016,-12.54 -26.945,-12.54 ; -27.016,-12.523 -26.945,-12.523 ; -27.016,-11.456 -26.465,-11.456 ; -27.016,-11.438 -26.465,-11.438 ; -27.016,-11.42 -26.465,-11.42 ; -27.016,-11.403 -26.482,-11.403 ; -26.998,-11.527 -26.447,-11.527 ; -26.998,-11.509 -26.447,-11.509 ; -26.998,-11.491 -26.447,-11.491 ; -26.998,-11.474 -26.465,-11.474 ; -26.98,-11.598 -26.429,-11.598 ; -26.98,-11.58 -26.429,-11.58 ; -26.98,-11.563 -26.429,-11.563 ; -26.98,-11.545 -26.447,-11.545 ; -26.962,-11.669 -26.393,-11.669 ; -26.962,-11.651 -26.411,-11.651 ; -26.962,-11.634 -26.411,-11.634 ; -26.962,-11.616 -26.429,-11.616 ; -26.945,-11.74 -26.322,-11.74 ; -26.945,-11.723 -26.358,-11.723 ; -26.945,-11.705 -26.376,-11.705 ; -26.945,-11.687 -26.393,-11.687 ; -26.927,-13.643 -26.873,-13.643 ; -26.927,-13.625 -26.873,-13.625 ; -26.927,-13.607 -26.873,-13.607 ; -26.927,-13.589 -26.873,-13.589 ; -26.927,-13.572 -26.873,-13.572 ; -26.927,-13.554 -26.873,-13.554 ; -26.927,-13.536 -26.873,-13.536 ; -26.927,-13.465 -26.873,-13.465 ; -26.927,-13.447 -26.873,-13.447 ; -26.927,-13.429 -26.873,-13.429 ; -26.927,-13.412 -26.873,-13.412 ; -26.927,-11.811 -25.522,-11.811 ; -26.927,-11.794 -25.522,-11.794 ; -26.927,-11.776 -25.522,-11.776 ; -26.927,-11.758 -25.54,-11.758 ; -26.909,-11.883 -25.522,-11.883 ; -26.909,-11.865 -25.522,-11.865 ; -26.909,-11.847 -25.522,-11.847 ; -26.909,-11.829 -25.522,-11.829 ; -26.891,-11.954 -26.34,-11.954 ; -26.891,-11.936 -26.34,-11.936 ; -26.891,-11.918 -25.522,-11.918 ; -26.891,-11.9 -25.522,-11.9 ; -26.873,-12.025 -26.322,-12.025 ; -26.873,-12.007 -26.322,-12.007 ; -26.873,-11.989 -26.34,-11.989 ; -26.873,-11.972 -26.34,-11.972 ; -26.856,-12.843 -26.678,-12.843 ; -26.856,-12.825 -26.785,-12.825 ; -26.856,-12.807 -26.785,-12.807 ; -26.856,-12.789 -26.785,-12.789 ; -26.856,-12.772 -26.731,-12.772 ; -26.856,-12.647 -26.696,-12.647 ; -26.856,-12.629 -26.713,-12.629 ; -26.856,-12.078 -26.305,-12.078 ; -26.856,-12.06 -26.322,-12.06 ; -26.856,-12.043 -26.322,-12.043 ; -26.838,-12.861 -26.678,-12.861 ; -26.838,-12.754 -26.696,-12.754 ; -26.838,-12.665 -26.678,-12.665 ; -26.82,-12.878 -26.678,-12.878 ; -26.82,-12.736 -26.678,-12.736 ; -26.802,-13.643 -26.749,-13.643 ; -26.802,-13.625 -26.749,-13.625 ; -26.802,-13.607 -26.749,-13.607 ; -26.802,-13.589 -26.749,-13.589 ; -26.802,-13.572 -26.749,-13.572 ; -26.802,-13.554 -26.749,-13.554 ; -26.802,-13.536 -26.749,-13.536 ; -26.802,-13.518 -26.749,-13.518 ; -26.802,-13.501 -26.749,-13.501 ; -26.802,-13.483 -26.749,-13.483 ; -26.802,-13.465 -26.749,-13.465 ; -26.802,-13.447 -26.749,-13.447 ; -26.802,-13.429 -26.749,-13.429 ; -26.802,-13.412 -26.749,-13.412 ; -26.802,-13.394 -26.749,-13.394 ; -26.802,-13.376 -26.749,-13.376 ; -26.802,-13.358 -26.749,-13.358 ; -26.767,-12.718 -26.678,-12.718 ; -26.749,-12.7 -26.678,-12.7 ; -26.749,-12.683 -26.678,-12.683 ; -26.66,-13.643 -26.607,-13.643 ; -26.66,-13.625 -26.607,-13.625 ; -26.66,-13.607 -26.607,-13.607 ; -26.607,-12.772 -26.358,-12.772 ; -26.607,-12.754 -26.358,-12.754 ; -26.607,-12.736 -26.358,-12.736 ; -26.607,-12.718 -26.536,-12.718 ; -26.607,-12.7 -26.536,-12.7 ; -26.589,-12.861 -26.411,-12.861 ; -26.589,-12.843 -26.393,-12.843 ; -26.589,-12.825 -26.571,-12.825 ; -26.589,-12.683 -26.536,-12.683 ; -26.589,-12.665 -26.393,-12.665 ; -26.571,-13.554 -26.518,-13.554 ; -26.571,-13.536 -26.518,-13.536 ; -26.571,-13.518 -26.518,-13.518 ; -26.571,-13.501 -26.518,-13.501 ; -26.571,-13.483 -26.518,-13.483 ; -26.571,-13.465 -26.518,-13.465 ; -26.571,-13.447 -26.518,-13.447 ; -26.571,-12.878 -26.429,-12.878 ; -26.571,-12.647 -26.393,-12.647 ; -26.553,-13.589 -26.482,-13.589 ; -26.553,-13.572 -26.5,-13.572 ; -26.553,-13.429 -26.5,-13.429 ; -26.553,-13.412 -26.482,-13.412 ; -26.553,-12.629 -26.429,-12.629 ; -26.536,-13.607 -26.322,-13.607 ; -26.536,-13.394 -26.322,-13.394 ; -26.518,-13.625 -26.322,-13.625 ; -26.518,-13.376 -26.322,-13.376 ; -26.5,-13.643 -26.322,-13.643 ; -26.5,-13.358 -26.322,-13.358 ; -26.465,-12.825 -26.376,-12.825 ; -26.447,-12.807 -26.376,-12.807 ; -26.447,-12.683 -26.376,-12.683 ; -26.429,-12.789 -26.358,-12.789 ; -26.429,-12.718 -26.358,-12.718 ; -26.429,-12.7 -26.376,-12.7 ; -26.376,-13.589 -26.322,-13.589 ; -26.376,-13.572 -26.322,-13.572 ; -26.376,-13.554 -26.322,-13.554 ; -26.376,-13.536 -26.322,-13.536 ; -26.376,-13.518 -26.322,-13.518 ; -26.376,-13.501 -26.322,-13.501 ; -26.376,-13.483 -26.322,-13.483 ; -26.376,-13.465 -26.322,-13.465 ; -26.376,-13.447 -26.322,-13.447 ; -26.376,-13.429 -26.322,-13.429 ; -26.376,-13.412 -26.322,-13.412 ; -26.358,-10.674 -25.807,-10.674 ; -26.358,-10.656 -25.807,-10.656 ; -26.358,-10.638 -25.807,-10.638 ; -26.34,-10.745 -25.789,-10.745 ; -26.34,-10.727 -25.789,-10.727 ; -26.34,-10.709 -25.789,-10.709 ; -26.34,-10.691 -25.807,-10.691 ; -26.322,-11.936 -25.54,-11.936 ; -26.322,-10.816 -25.771,-10.816 ; -26.322,-10.798 -25.771,-10.798 ; -26.322,-10.78 -25.771,-10.78 ; -26.322,-10.762 -25.789,-10.762 ; -26.305,-12.736 -26.216,-12.736 ; -26.305,-12.718 -26.216,-12.718 ; -26.305,-12.7 -26.216,-12.7 ; -26.305,-12.683 -26.216,-12.683 ; -26.305,-11.954 -25.54,-11.954 ; -26.305,-10.887 -25.753,-10.887 ; -26.305,-10.869 -25.753,-10.869 ; -26.305,-10.851 -25.753,-10.851 ; -26.305,-10.834 -25.771,-10.834 ; -26.287,-13.643 -26.233,-13.643 ; -26.287,-12.789 -26.198,-12.789 ; -26.287,-12.772 -26.198,-12.772 ; -26.287,-12.754 -26.216,-12.754 ; -26.287,-12.665 -26.216,-12.665 ; -26.287,-12.647 -26.198,-12.647 ; -26.287,-12.629 -26.198,-12.629 ; -26.287,-11.972 -25.54,-11.972 ; -26.287,-10.958 -25.736,-10.958 ; -26.287,-10.94 -25.736,-10.94 ; -26.287,-10.922 -25.736,-10.922 ; -26.287,-10.905 -25.753,-10.905 ; -26.269,-13.625 -26.216,-13.625 ; -26.269,-13.607 -26.216,-13.607 ; -26.269,-13.589 -26.216,-13.589 ; -26.269,-12.825 -26.127,-12.825 ; -26.269,-12.807 -26.162,-12.807 ; -26.269,-12.612 -26.18,-12.612 ; -26.269,-12.594 -26.144,-12.594 ; -26.269,-11.989 -25.558,-11.989 ; -26.269,-11.029 -25.718,-11.029 ; -26.269,-11.011 -25.718,-11.011 ; -26.269,-10.994 -25.718,-10.994 ; -26.269,-10.976 -25.736,-10.976 ; -26.251,-13.572 -26.02,-13.572 ; -26.251,-13.554 -26.02,-13.554 ; -26.251,-13.536 -26.02,-13.536 ; -26.251,-12.843 -26.002,-12.843 ; -26.251,-12.576 -26.002,-12.576 ; -26.251,-12.007 -25.558,-12.007 ; -26.251,-11.1 -25.7,-11.1 ; -26.251,-11.083 -25.7,-11.083 ; -26.251,-11.065 -25.7,-11.065 ; -26.251,-11.047 -25.718,-11.047 ; -26.233,-13.518 -26.18,-13.518 ; -26.233,-13.501 -26.18,-13.501 ; -26.233,-12.558 -26.002,-12.558 ; -26.233,-11.171 -25.682,-11.171 ; -26.233,-11.154 -25.682,-11.154 ; -26.233,-11.136 -25.682,-11.136 ; -26.233,-11.118 -25.7,-11.118 ; -26.216,-13.483 -26.162,-13.483 ; -26.216,-13.465 -26.162,-13.465 ; -26.216,-13.447 -26.144,-13.447 ; -26.216,-12.861 -26.002,-12.861 ; -26.216,-12.025 -25.576,-12.025 ; -26.216,-11.243 -25.664,-11.243 ; -26.216,-11.225 -25.664,-11.225 ; -26.216,-11.207 -25.664,-11.207 ; -26.216,-11.189 -25.682,-11.189 ; -26.198,-13.429 -26.144,-13.429 ; -26.198,-13.412 -26.144,-13.412 ; -26.198,-12.043 -25.593,-12.043 ; -26.198,-11.314 -25.647,-11.314 ; -26.198,-11.296 -25.647,-11.296 ; -26.198,-11.278 -25.647,-11.278 ; -26.198,-11.26 -25.664,-11.26 ; -26.18,-13.394 -26.091,-13.394 ; -26.18,-13.376 -26.091,-13.376 ; -26.18,-13.358 -26.091,-13.358 ; -26.18,-12.878 -26.002,-12.878 ; -26.18,-12.54 -26.002,-12.54 ; -26.18,-11.385 -25.629,-11.385 ; -26.18,-11.367 -25.629,-11.367 ; -26.18,-11.349 -25.629,-11.349 ; -26.18,-11.331 -25.647,-11.331 ; -26.162,-12.06 -25.629,-12.06 ; -26.162,-11.456 -25.611,-11.456 ; -26.162,-11.438 -25.611,-11.438 ; -26.162,-11.42 -25.611,-11.42 ; -26.162,-11.403 -25.629,-11.403 ; -26.144,-11.74 -25.54,-11.74 ; -26.144,-11.527 -25.593,-11.527 ; -26.144,-11.509 -25.593,-11.509 ; -26.144,-11.491 -25.593,-11.491 ; -26.144,-11.474 -25.611,-11.474 ; -26.127,-13.447 -26.056,-13.447 ; -26.127,-13.429 -26.073,-13.429 ; -26.127,-13.412 -26.073,-13.412 ; -26.127,-12.078 -25.664,-12.078 ; -26.127,-11.723 -25.54,-11.723 ; -26.127,-11.705 -25.54,-11.705 ; -26.127,-11.598 -25.576,-11.598 ; -26.127,-11.58 -25.576,-11.58 ; -26.127,-11.563 -25.576,-11.563 ; -26.127,-11.545 -25.593,-11.545 ; -26.109,-13.483 -26.056,-13.483 ; -26.109,-13.465 -26.056,-13.465 ; -26.109,-11.687 -25.558,-11.687 ; -26.109,-11.669 -25.558,-11.669 ; -26.109,-11.651 -25.558,-11.651 ; -26.109,-11.634 -25.558,-11.634 ; -26.109,-11.616 -25.576,-11.616 ; -26.091,-13.518 -26.038,-13.518 ; -26.091,-13.501 -26.038,-13.501 ; -26.073,-12.825 -26.002,-12.825 ; -26.073,-12.807 -26.002,-12.807 ; -26.073,-12.789 -26.002,-12.789 ; -26.073,-12.772 -26.002,-12.772 ; -26.073,-12.754 -26.002,-12.754 ; -26.073,-12.736 -26.002,-12.736 ; -26.073,-12.718 -26.002,-12.718 ; -26.073,-12.7 -26.002,-12.7 ; -26.073,-12.683 -26.002,-12.683 ; -26.073,-12.665 -26.002,-12.665 ; -26.073,-12.647 -26.002,-12.647 ; -26.073,-12.629 -26.002,-12.629 ; -26.073,-12.612 -26.002,-12.612 ; -26.073,-12.594 -26.002,-12.594 ; -26.073,-12.096 -25.7,-12.096 ; -26.056,-13.625 -26.002,-13.625 ; -26.056,-13.607 -26.002,-13.607 ; -26.056,-13.589 -26.002,-13.589 ; -26.038,-13.643 -25.984,-13.643 ; -25.984,-12.114 -25.789,-12.114 ; -25.967,-13.589 -25.896,-13.589 ; -25.967,-13.572 -25.913,-13.572 ; -25.967,-13.554 -25.913,-13.554 ; -25.967,-13.536 -25.896,-13.536 ; -25.949,-13.625 -25.718,-13.625 ; -25.949,-13.607 -25.718,-13.607 ; -25.949,-13.518 -25.718,-13.518 ; -25.949,-13.465 -25.878,-13.465 ; -25.949,-13.447 -25.896,-13.447 ; -25.949,-13.429 -25.896,-13.429 ; -25.949,-13.412 -25.878,-13.412 ; -25.931,-13.501 -25.718,-13.501 ; -25.931,-13.483 -25.718,-13.483 ; -25.931,-13.394 -25.718,-13.394 ; -25.931,-13.376 -25.718,-13.376 ; -25.913,-13.643 -25.718,-13.643 ; -25.913,-13.358 -25.718,-13.358 ; -25.771,-13.589 -25.718,-13.589 ; -25.771,-13.572 -25.718,-13.572 ; -25.771,-13.554 -25.718,-13.554 ; -25.771,-13.536 -25.718,-13.536 ; -25.771,-13.465 -25.718,-13.465 ; -25.771,-13.447 -25.718,-13.447 ; -25.771,-13.429 -25.718,-13.429 ; -25.771,-13.412 -25.718,-13.412 ; -25.736,-12.843 -25.558,-12.843 ; -25.736,-12.825 -25.664,-12.825 ; -25.736,-12.807 -25.664,-12.807 ; -25.736,-12.789 -25.664,-12.789 ; -25.736,-12.772 -25.611,-12.772 ; -25.736,-12.754 -25.576,-12.754 ; -25.736,-12.665 -25.558,-12.665 ; -25.736,-12.647 -25.576,-12.647 ; -25.736,-12.629 -25.593,-12.629 ; -25.718,-12.861 -25.558,-12.861 ; -25.7,-12.878 -25.558,-12.878 ; -25.7,-12.736 -25.558,-12.736 ; -25.682,-13.643 -25.629,-13.643 ; -25.664,-13.625 -25.611,-13.625 ; -25.664,-13.607 -25.611,-13.607 ; -25.664,-13.589 -25.611,-13.589 ; -25.647,-13.572 -25.416,-13.572 ; -25.647,-13.554 -25.416,-13.554 ; -25.647,-13.536 -25.416,-13.536 ; -25.647,-12.718 -25.558,-12.718 ; -25.629,-13.518 -25.576,-13.518 ; -25.629,-13.501 -25.576,-13.501 ; -25.629,-12.7 -25.558,-12.7 ; -25.629,-12.683 -25.558,-12.683 ; -25.611,-13.483 -25.558,-13.483 ; -25.611,-13.465 -25.558,-13.465 ; -25.611,-13.447 -25.54,-13.447 ; -25.593,-13.429 -25.54,-13.429 ; -25.593,-13.412 -25.54,-13.412 ; -25.576,-13.394 -25.487,-13.394 ; -25.576,-13.376 -25.487,-13.376 ; -25.576,-13.358 -25.487,-13.358 ; -25.576,-10.638 -25.024,-10.638 ; -25.558,-10.709 -25.007,-10.709 ; -25.558,-10.691 -25.007,-10.691 ; -25.558,-10.674 -25.007,-10.674 ; -25.558,-10.656 -25.024,-10.656 ; -25.54,-10.78 -24.989,-10.78 ; -25.54,-10.762 -24.989,-10.762 ; -25.54,-10.745 -24.989,-10.745 ; -25.54,-10.727 -25.007,-10.727 ; -25.522,-13.447 -25.451,-13.447 ; -25.522,-13.429 -25.469,-13.429 ; -25.522,-13.412 -25.469,-13.412 ; -25.522,-10.851 -24.971,-10.851 ; -25.522,-10.834 -24.971,-10.834 ; -25.522,-10.816 -24.971,-10.816 ; -25.522,-10.798 -24.989,-10.798 ; -25.504,-13.483 -25.451,-13.483 ; -25.504,-13.465 -25.451,-13.465 ; -25.504,-12.878 -25.38,-12.878 ; -25.504,-12.861 -25.344,-12.861 ; -25.504,-12.843 -25.327,-12.843 ; -25.504,-12.629 -25.362,-12.629 ; -25.504,-10.922 -24.953,-10.922 ; -25.504,-10.905 -24.953,-10.905 ; -25.504,-10.887 -24.953,-10.887 ; -25.504,-10.869 -24.971,-10.869 ; -25.487,-13.518 -25.433,-13.518 ; -25.487,-13.501 -25.433,-13.501 ; -25.487,-12.665 -25.327,-12.665 ; -25.487,-12.647 -25.344,-12.647 ; -25.487,-10.994 -24.935,-10.994 ; -25.487,-10.976 -24.935,-10.976 ; -25.487,-10.958 -24.935,-10.958 ; -25.487,-10.94 -24.953,-10.94 ; -25.469,-11.065 -24.918,-11.065 ; -25.469,-11.047 -24.918,-11.047 ; -25.469,-11.029 -24.918,-11.029 ; -25.469,-11.011 -24.935,-11.011 ; -25.451,-13.625 -25.398,-13.625 ; -25.451,-13.607 -25.398,-13.607 ; -25.451,-13.589 -25.398,-13.589 ; -25.451,-11.136 -24.9,-11.136 ; -25.451,-11.118 -24.9,-11.118 ; -25.451,-11.1 -24.9,-11.1 ; -25.451,-11.083 -24.918,-11.083 ; -25.433,-13.643 -25.38,-13.643 ; -25.433,-11.207 -24.882,-11.207 ; -25.433,-11.189 -24.882,-11.189 ; -25.433,-11.171 -24.882,-11.171 ; -25.433,-11.154 -24.9,-11.154 ; -25.416,-12.825 -25.309,-12.825 ; -25.416,-11.278 -24.864,-11.278 ; -25.416,-11.26 -24.864,-11.26 ; -25.416,-11.243 -24.864,-11.243 ; -25.416,-11.225 -24.882,-11.225 ; -25.398,-12.807 -25.309,-12.807 ; -25.398,-12.7 -25.309,-12.7 ; -25.398,-12.683 -25.309,-12.683 ; -25.398,-11.349 -24.847,-11.349 ; -25.398,-11.331 -24.847,-11.331 ; -25.398,-11.314 -24.847,-11.314 ; -25.398,-11.296 -24.864,-11.296 ; -25.38,-12.789 -25.309,-12.789 ; -25.38,-12.772 -25.309,-12.772 ; -25.38,-12.754 -25.309,-12.754 ; -25.38,-12.736 -25.309,-12.736 ; -25.38,-12.718 -25.309,-12.718 ; -25.38,-11.42 -24.829,-11.42 ; -25.38,-11.403 -24.829,-11.403 ; -25.38,-11.385 -24.829,-11.385 ; -25.38,-11.367 -24.847,-11.367 ; -25.362,-11.491 -24.811,-11.491 ; -25.362,-11.474 -24.811,-11.474 ; -25.362,-11.456 -24.811,-11.456 ; -25.362,-11.438 -24.829,-11.438 ; -25.344,-13.643 -25.273,-13.643 ; -25.344,-13.625 -25.273,-13.625 ; -25.344,-13.607 -25.255,-13.607 ; -25.344,-13.589 -25.255,-13.589 ; -25.344,-13.572 -25.238,-13.572 ; -25.344,-13.554 -25.238,-13.554 ; -25.344,-13.536 -25.291,-13.536 ; -25.344,-13.518 -25.291,-13.518 ; -25.344,-13.501 -25.291,-13.501 ; -25.344,-13.483 -25.291,-13.483 ; -25.344,-13.465 -25.291,-13.465 ; -25.344,-13.447 -25.291,-13.447 ; -25.344,-13.429 -25.291,-13.429 ; -25.344,-13.412 -25.291,-13.412 ; -25.344,-13.394 -25.291,-13.394 ; -25.344,-13.376 -25.291,-13.376 ; -25.344,-13.358 -25.291,-13.358 ; -25.344,-11.563 -24.793,-11.563 ; -25.344,-11.545 -24.793,-11.545 ; -25.344,-11.527 -24.793,-11.527 ; -25.344,-11.509 -24.811,-11.509 ; -25.327,-11.634 -24.775,-11.634 ; -25.327,-11.616 -24.775,-11.616 ; -25.327,-11.598 -24.775,-11.598 ; -25.327,-11.58 -24.793,-11.58 ; -25.309,-11.705 -24.758,-11.705 ; -25.309,-11.687 -24.758,-11.687 ; -25.309,-11.669 -24.758,-11.669 ; -25.309,-11.651 -24.775,-11.651 ; -25.291,-11.776 -24.74,-11.776 ; -25.291,-11.758 -24.74,-11.758 ; -25.291,-11.74 -24.74,-11.74 ; -25.291,-11.723 -24.758,-11.723 ; -25.273,-13.536 -25.22,-13.536 ; -25.273,-13.518 -25.202,-13.518 ; -25.273,-11.847 -24.722,-11.847 ; -25.273,-11.829 -24.722,-11.829 ; -25.273,-11.811 -24.722,-11.811 ; -25.273,-11.794 -24.74,-11.794 ; -25.255,-13.501 -25.202,-13.501 ; -25.255,-11.918 -24.704,-11.918 ; -25.255,-11.9 -24.704,-11.9 ; -25.255,-11.883 -24.704,-11.883 ; -25.255,-11.865 -24.722,-11.865 ; -25.238,-13.483 -25.184,-13.483 ; -25.238,-13.465 -25.184,-13.465 ; -25.238,-11.989 -24.687,-11.989 ; -25.238,-11.972 -24.687,-11.972 ; -25.238,-11.954 -24.687,-11.954 ; -25.238,-11.936 -24.704,-11.936 ; -25.22,-13.447 -25.113,-13.447 ; -25.22,-13.429 -25.113,-13.429 ; -25.22,-12.878 -25.149,-12.878 ; -25.22,-12.861 -25.149,-12.861 ; -25.22,-12.843 -25.149,-12.843 ; -25.22,-12.825 -25.149,-12.825 ; -25.22,-12.807 -25.149,-12.807 ; -25.22,-12.789 -25.149,-12.789 ; -25.22,-12.772 -25.149,-12.772 ; -25.22,-12.754 -25.149,-12.754 ; -25.22,-12.736 -25.149,-12.736 ; -25.22,-12.718 -25.149,-12.718 ; -25.22,-12.7 -25.149,-12.7 ; -25.22,-12.683 -25.149,-12.683 ; -25.22,-12.665 -25.149,-12.665 ; -25.22,-12.647 -25.149,-12.647 ; -25.22,-12.629 -25.149,-12.629 ; -25.22,-12.558 -25.149,-12.558 ; -25.22,-12.54 -25.149,-12.54 ; -25.22,-12.523 -25.149,-12.523 ; -25.22,-12.06 -24.669,-12.06 ; -25.22,-12.043 -24.669,-12.043 ; -25.22,-12.025 -24.669,-12.025 ; -25.22,-12.007 -24.687,-12.007 ; -25.202,-13.412 -25.113,-13.412 ; -25.202,-13.394 -25.113,-13.394 ; -25.202,-12.078 -24.669,-12.078 ; -25.184,-13.376 -25.113,-13.376 ; -25.167,-13.643 -25.113,-13.643 ; -25.167,-13.625 -25.113,-13.625 ; -25.167,-13.607 -25.113,-13.607 ; -25.167,-13.589 -25.113,-13.589 ; -25.167,-13.572 -25.113,-13.572 ; -25.167,-13.554 -25.113,-13.554 ; -25.167,-13.536 -25.113,-13.536 ; -25.167,-13.518 -25.113,-13.518 ; -25.167,-13.501 -25.113,-13.501 ; -25.167,-13.483 -25.113,-13.483 ; -25.167,-13.465 -25.113,-13.465 ; -25.167,-13.358 -25.113,-13.358 ; -25.06,-13.554 -24.989,-13.554 ; -25.06,-13.536 -25.007,-13.536 ; -25.06,-13.518 -25.007,-13.518 ; -25.06,-13.501 -25.007,-13.501 ; -25.06,-13.483 -25.007,-13.483 ; -25.06,-13.465 -25.007,-13.465 ; -25.06,-13.447 -24.989,-13.447 ; -25.06,-12.878 -24.989,-12.878 ; -25.06,-12.861 -24.989,-12.861 ; -25.06,-12.843 -24.989,-12.843 ; -25.06,-12.825 -24.989,-12.825 ; -25.06,-12.807 -24.989,-12.807 ; -25.06,-12.789 -24.989,-12.789 ; -25.06,-12.772 -24.989,-12.772 ; -25.06,-12.754 -24.989,-12.754 ; -25.06,-12.736 -24.989,-12.736 ; -25.06,-12.718 -24.989,-12.718 ; -25.06,-12.7 -24.989,-12.7 ; -25.06,-12.683 -24.971,-12.683 ; -25.042,-13.589 -24.953,-13.589 ; -25.042,-13.572 -24.989,-13.572 ; -25.042,-13.429 -24.989,-13.429 ; -25.042,-13.412 -24.953,-13.412 ; -25.042,-12.665 -24.811,-12.665 ; -25.042,-12.647 -24.811,-12.647 ; -25.024,-13.607 -24.811,-13.607 ; -25.024,-13.394 -24.811,-13.394 ; -25.024,-12.629 -24.918,-12.629 ; -25.007,-13.625 -24.829,-13.625 ; -25.007,-13.376 -24.829,-13.376 ; -24.971,-13.643 -24.864,-13.643 ; -24.971,-13.358 -24.864,-13.358 ; -24.918,-12.683 -24.811,-12.683 ; -24.9,-12.718 -24.811,-12.718 ; -24.9,-12.7 -24.811,-12.7 ; -24.882,-13.589 -24.793,-13.589 ; -24.882,-13.412 -24.793,-13.412 ; -24.882,-12.878 -24.811,-12.878 ; -24.882,-12.861 -24.811,-12.861 ; -24.882,-12.843 -24.811,-12.843 ; -24.882,-12.825 -24.811,-12.825 ; -24.882,-12.807 -24.811,-12.807 ; -24.882,-12.789 -24.811,-12.789 ; -24.882,-12.772 -24.811,-12.772 ; -24.882,-12.754 -24.811,-12.754 ; -24.882,-12.736 -24.811,-12.736 ; -24.882,-12.629 -24.811,-12.629 ; -24.847,-13.572 -24.793,-13.572 ; -24.847,-13.554 -24.775,-13.554 ; -24.847,-13.447 -24.775,-13.447 ; -24.847,-13.429 -24.793,-13.429 ; -24.829,-13.536 -24.775,-13.536 ; -24.829,-13.518 -24.775,-13.518 ; -24.829,-13.501 -24.775,-13.501 ; -24.829,-13.483 -24.775,-13.483 ; -24.829,-13.465 -24.775,-13.465 ; -24.829,-10.638 -24.046,-10.638 ; -24.829,-10.62 -24.064,-10.62 ; -24.811,-10.709 -24.029,-10.709 ; -24.811,-10.691 -24.046,-10.691 ; -24.811,-10.674 -24.046,-10.674 ; -24.811,-10.656 -24.046,-10.656 ; -24.793,-10.78 -24.011,-10.78 ; -24.793,-10.762 -24.029,-10.762 ; -24.793,-10.745 -24.029,-10.745 ; -24.793,-10.727 -24.029,-10.727 ; -24.775,-10.851 -23.993,-10.851 ; -24.775,-10.834 -24.011,-10.834 ; -24.775,-10.816 -24.011,-10.816 ; -24.775,-10.798 -24.011,-10.798 ; -24.758,-10.922 -23.975,-10.922 ; -24.758,-10.905 -23.993,-10.905 ; -24.758,-10.887 -23.993,-10.887 ; -24.758,-10.869 -23.993,-10.869 ; -24.74,-12.807 -24.651,-12.807 ; -24.74,-12.789 -24.669,-12.789 ; -24.74,-12.772 -24.669,-12.772 ; -24.74,-12.754 -24.669,-12.754 ; -24.74,-12.736 -24.669,-12.736 ; -24.74,-12.718 -24.669,-12.718 ; -24.74,-12.7 -24.651,-12.7 ; -24.74,-10.94 -23.975,-10.94 ; -24.722,-13.607 -24.473,-13.607 ; -24.722,-13.589 -24.633,-13.589 ; -24.722,-13.572 -24.669,-13.572 ; -24.722,-13.554 -24.669,-13.554 ; -24.722,-13.536 -24.598,-13.536 ; -24.722,-13.518 -24.598,-13.518 ; -24.722,-13.501 -24.598,-13.501 ; -24.722,-13.412 -24.633,-13.412 ; -24.722,-12.825 -24.633,-12.825 ; -24.722,-12.683 -24.633,-12.683 ; -24.722,-10.176 -24.171,-10.176 ; -24.704,-13.429 -24.669,-13.429 ; -24.704,-13.394 -24.473,-13.394